# EAGLE board KAI_nano (EAGLE 9.6.2)
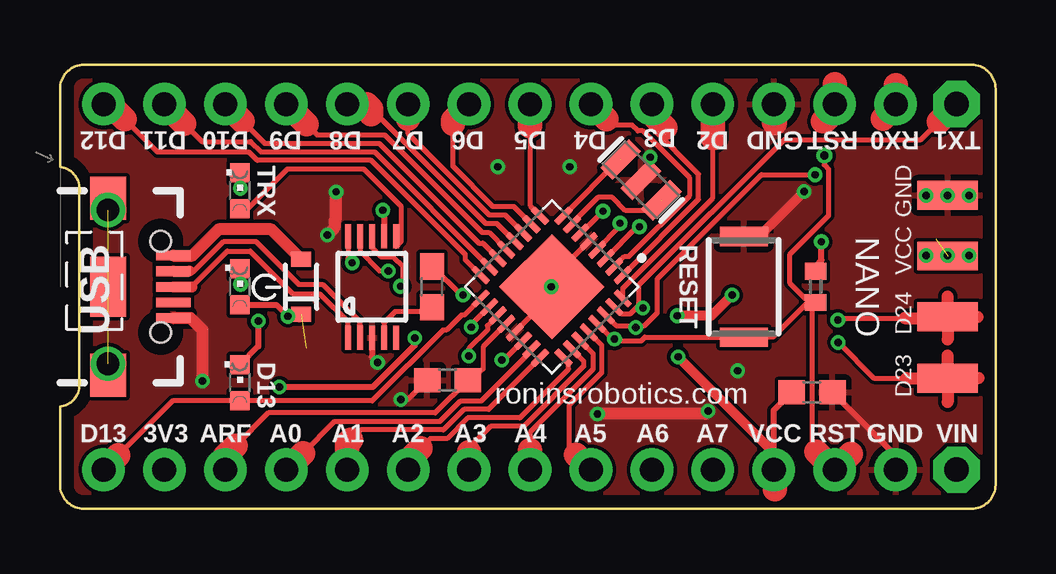
[diagram p0: board, top side]
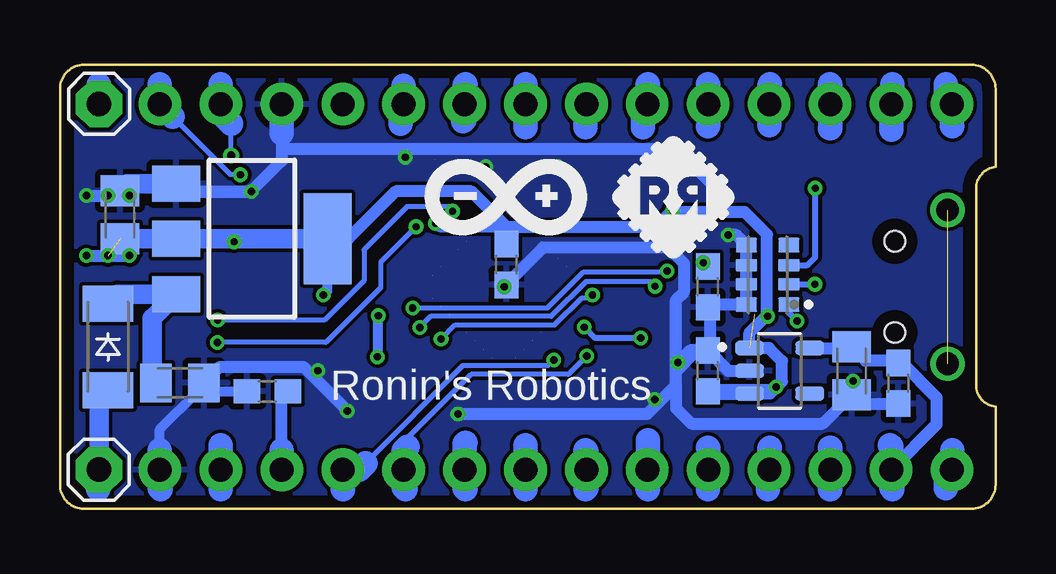
[diagram p1: board, bottom side, seen from below]

Size 39 x 18.5 mm. Coordinates in mm from the lower left corner, seen from the top.
Outline: 1,18.5 arc90 0,17.5 0,14.25 arc-90 0.8,13.25 0.8,5.25 arc-90 0,4.25 0,1 arc90 1,0 38,0 arc90 39,1 39,17.5 arc90 38,18.5 1,18.5
Copper layers (1*16): Top 0.035mm / dielectric 1.6mm / Bottom 0.035mm
Design rules "Elecrow_2-layer_PCB_eagle_rule": minimum track width 6mil, minimum drill 12mil, track to track 6mil, track to pad 6mil, pad to pad 6mil, via to via 8mil, smd to smd 0mil, copper to edge 20mil, drill to drill 10mil, minimum pad ring 6mil, minimum via ring 6mil, stop-mask expansion 0mil, vias tented up to drill 100mil, thermal gap 10mil

## Footprints (pad centres in the part's own frame; a part is rotated, then mirrored left to right if it is on the bottom)
C0805K = smd 1.3 x 1.6: 1 -1,0; 2 1,0
SOD-323 = smd 0.63 x 0.83: 1 -1.15,0; 2 1.15,0
SOT223 = smd 1.5 x 2: 1 -2.3,-3.15; 2 0,-3.15; 3 2.3,-3.15 | smd 3.8 x 2: 4 0,3.15
USB-B-MICRO-SMD = smd 1.45 x 0.4: D+ 2.725,0; D- 2.725,0.65; GND 2.725,-1.3; ID 2.725,-0.65; VBUS 2.725,1.3 | smd 1.5 x 1.8: SHIELD1 0,3.685; SHIELD2 0,-3.685 | smd 1.5 x 2.5: SHIELD3 0,0 | hole 0.85: 2.2,1.9; 2.2,-1.9
1X01 = drill 1.016 pad 1.93 octagon: 1 0,0
SMD_PAD_1.2MM = smd 2.54 x 1.2: 1 0,0
R0402 = smd 0.7 x 0.9: 1 -0.65,0; 2 0.65,0
RESCAXS80P320X160X70-8N = smd 0.61 x 0.9: 1 -1.24,-0.885; 4 1.24,-0.885; 5 1.24,0.885; 8 -1.24,0.885 | smd 0.53 x 0.9: 2 -0.4,-0.885; 3 0.4,-0.885; 6 0.4,0.885; 7 -0.4,0.885
SKRK = smd 0.8 x 2: 1 -2.1,0; 2 2.1,0
MSOP10 = smd 1 x 0.25: 1 -2.113,1; 2 -2.113,0.5; 3 -2.113,0; 4 -2.113,-0.5; 5 -2.113,-1; 6 2.113,-1; 7 2.113,-0.5; 8 2.113,0; 9 2.113,0.5; 10 2.113,1
QFN50P500X500X90-33N = smd 0.86 x 0.26: 1 -2.435,1.75; 2 -2.435,1.25; 3 -2.435,0.75; 4 -2.435,0.25; 5 -2.435,-0.25; 6 -2.435,-0.75; 7 -2.435,-1.25; 8 -2.435,-1.75; 17 2.435,-1.75; 18 2.435,-1.25; 19 2.435,-0.75; 20 2.435,-0.25; 21 2.435,0.25; 22 2.435,0.75; 23 2.435,1.25; 24 2.435,1.75 | smd 0.26 x 0.86: 9 -1.75,-2.435; 10 -1.25,-2.435; 11 -0.75,-2.435; 12 -0.25,-2.435; 13 0.25,-2.435; 14 0.75,-2.435; 15 1.25,-2.435; 16 1.75,-2.435; 25 1.75,2.435; 26 1.25,2.435; 27 0.75,2.435; 28 0.25,2.435; 29 -0.25,2.435; 30 -0.75,2.435; 31 -1.25,2.435; 32 -1.75,2.435 | smd 3.1 x 3.1: 33 0,0
SOT95P280X145-5N = smd 1.21 x 0.59: 1 -1.255,0.95; 2 -1.255,0; 3 -1.255,-0.95; 4 1.255,-0.95; 5 1.255,0.95
RESONATOR-SMD = smd 0.7 x 1.7: 1 -1.2,0; 2 0,0; 3 1.2,0
C0603 = smd 1.1 x 1: 1 -0.85,0; 2 0.85,0
0603_LED_GREEN = smd 0.8 x 0.8: A 0,-0.75; C 0,0.75
SOD-123_MINI-SMA = smd 1.5 x 2.1: A 1.8,0; C -1.8,0
ARDUINO_NANO = drill 1 pad 1.778: 3V3 7.874,2.794; A0 7.874,7.874; A1 7.874,10.414; A2 7.874,12.954; A3 7.874,15.494; A4 7.874,18.034; A5 7.874,20.574; A6 7.874,23.114; A7 7.874,25.654; D2 -7.366,25.654; D3 -7.366,23.114; D4 -7.366,20.574; D5 -7.366,18.034; D6 -7.366,15.494; D7 -7.366,12.954; D8 -7.366,10.414; D9 -7.366,7.874; D10 -7.366,5.334; D11 -7.366,2.794; D12 -7.366,0.254; D13 7.874,0.254; GND -7.366,28.194; GND1 7.874,33.274; REF 7.874,5.334; RST -7.366,30.734; RST1 7.874,30.734; RX0 -7.366,33.274; TX1 -7.366,35.814; VA 7.874,35.814; VCCA 7.874,28.194

## Placement (x,y rotation side)
C1  CAPACITOR_CER6  [C0805K]  34,5.25 0 bottom
C2  CAPACITOR_CER6  [C0805K]  36.5,12.25 90 bottom
C3  CAPACITOR_CER6  [C0805K]  6,5.75 270 bottom
D2  [SOD-323]  10.05,9.25 90 top
IC1  LD117AS18TR  [SOT223]  31,11.25 270 bottom
J1  [USB-B-MICRO-SMD]  2,9.25 0 top
JP1  [1X01]  37.38,1.63 0 bottom
JP2  [1X01]  37.37,16.87 0 bottom
PAD1  SMD_PAD  [SMD_PAD_1.2MM]  37,5.44 180 top
PAD2  SMD_PAD  [SMD_PAD_1.2MM]  37,13.06 180 top
PAD3  SMD_PAD  [SMD_PAD_1.2MM]  37,10.53 180 top
PAD4  SMD_PAD  [SMD_PAD_1.2MM]  37,8 180 top
R1  RESISTOR1  [R0402]  31.5,9.25 90 top
R7  YC164-JR-071K5  [RESCAXS80P320X160X70-8N]  9.5,9.75 90 bottom
S1  SKRKAEE010  [SKRK]  28.5,9.25 270 top
U1  CH340ESMD  [MSOP10]  13,9.25 90 top
U2  ATMEGA328PB-MU  [QFN50P500X500X90-33N]  20.5,9.25 225 top
U3  TLV73333  [SOT95P280X145-5N]  9,5.75 0 bottom
U$2  RESONATORSMD  [RESONATOR-SMD]  24.22,13.71 315 top
U$5  CAPACITOR_CER4  [C0603]  4.05,5.23 90 bottom
U$7  CAPACITOR_CER4  [C0603]  16.15,5.36 0 top
U$8  CAPACITOR_CER4  [C0603]  20.39,10.18 90 bottom
U$9  CAPACITOR_CER4  [C0603]  15.5,9.25 270 top
U$10  CAPACITOR_CER4  [C0603]  12,9.25 270 bottom
U$12  LED0603_R  [0603_LED_GREEN]  7.5,13.25 0 top
U$14  LED0603_R  [0603_LED_GREEN]  7.5,9.25 0 top
U$15  DIODE123  [SOD-123_MINI-SMA]  37,6.75 270 bottom
U$17  CAPACITOR_CER4  [C0603]  31.35,4.85 0 top
U$18  CAPACITOR_CER4  [C0603]  12,5.75 90 bottom
U$19  CAPACITOR_CER4  [C0603]  30.36,4.89 180 bottom
U$21  LED0603_R  [0603_LED_GREEN]  7.5,5.25 0 top
U$23  ARDUINO_NANO  [ARDUINO_NANO]  1.56,9.5 270 top

## Library data of the parts
C1-C3 R1 U$5 U$7-U$10 U$12 U$14 U$15 U$17-U$19 U$21 = pasif_com1
D2 U$2 = SparkFun
IC1 = v-reg
J1 = SparkFun-Connectors; PROD_ID: CONN-11752
JP1 JP2 = adafruit
PAD1-PAD4 = smd_pad
R7 = YC164-JR-071K5; AVAILABILITY: Unavailable; DESCRIPTION: Resistor network: Y; 1.5kΩ; SMD; 1206; No.of resistors: 4; 63mW; ±5%; MF: Yageo; MP: YC164-JR-071K5; PACKAGE: 1206 Yageo; PRICE: None
S1 = SKRKAEE010; AVAILABILITY: Unavailable; DESCRIPTION: Switch Tactile N.O. SPST Round Button Gull Wing 0.05A 12VDC 1.57N SMD T/R; MF: ALPS; MP: SKRKAEE010; PACKAGE: None; PRICE: None
U1 = CH340E
U2 = atmega; MANUFACTURER: MICROCHIP; PACKAGE: QFN-32; PARTREV: C; STANDARD: IPC 7351B
U3 = TLV73318PDBVR; DESCRIPTION: Capacitor-Free, 300-mA, Low-Dropout Regulator with Foldback Current Limit for Portable Devices 5-SOT-23 -40 to 125; DIGI-KEY_PART_NUMBER: 296-40669-1-ND; DIGI-KEY_PURCHASE_URL: https://www.digikey.com/product-detail/en/texas-instruments/TLV73318PDBVR/296-40669-1-ND/5178546?utm_source=snapeda&utm_medium=aggregator&utm_campaign=symbol; MF: Texas Instruments; MP: TLV73318PDBVR; PACKAGE: SOT-23 Texas Instruments
U$23 = arduino_nano

## Nets
33: C3.1 U3.5 U$5.2 U$23.3V3
A0: U2.23 U$23.A0
A1: U2.24 U$23.A1
A2: U2.25 U$23.A2
A3: U2.26 U$23.A3
A4: U2.27 U$23.A4
A5: U2.28 U$23.A5
A6: U2.19 U$23.A6
A7: U2.22 U$23.A7
ARF: U2.20 U$7.2 U$23.REF
D2: U2.32 U$23.D2
D3: U2.1 U$23.D3
D4: U2.2 U$23.D4
D5: U2.9 U$23.D5
D6: U2.10 U$23.D6
D7: U2.11 U$23.D7
D8: U2.12 U$23.D8
D9: U2.13 U$23.D9
D10: U2.14 U$23.D10
D11: U2.15 U$23.D11
D12: U2.16 U$23.D12
D13: U2.17 U$21.A U$23.D13
D23: PAD1.1 U2.3
D24: PAD4.1 U2.6
GND: C1.2 C2.2 C3.2 IC1.1 J1.GND PAD2.1 R7.5 R7.6 R7.7 R7.8 S1.1 U1.3 U2.5 U2.21 U3.2 U$2.2 U$5.1 U$7.1 U$8.1 U$10.2 U$17.2 U$18.2 U$19.2 U$23.GND U$23.GND1
IN: U$15.A U$23.VA
N$1: R7.1 U$21.C
N$3: J1.D- U1.2
N$4: R7.3 U$12.C
N$5: U1.10 U$10.1
N$6: J1.D+ U1.1
N$7: D2.2 J1.VBUS
N$8: U1.4 U$9.2
N$9: R7.2 U$14.C
N$10: U1.6 U$12.A
N$12: C1.1 IC1.3 U$15.C
OC1: U2.7 U$2.3
OC2: U2.8 U$2.1
RST: R1.1 S1.2 U2.29 U$9.1 U$23.RST U$23.RST1
RX: U1.8 U2.30 U$23.RX0
TX: U1.9 U2.31 U$23.TX1
VCC: C2.1 D2.1 IC1.4 PAD3.1 R1.2 U1.7 U2.4 U2.18 U3.1 U3.3 U$8.2 U$14.A U$17.1 U$18.1 U$19.1 U$23.VCCA

## Tracks (layer width: path | path; a pad name or v marks a point on that pad's centre or on a via)
33
  Bottom 0.508: U3.5 6.05,6.7 C3.1 5.41,6.16 4.13,6.16 U$5.2 3.91,6.08 2.47,4.63 2.47,3.51 U$23.3V3
  Bottom 1.016: 4.3,0.82 4.35,0.87 U$23.3V3 4.35,2.6 4.4,2.65
A0  (1 unrouted)
  Top 0.203: 10.13,2.32 11.45,3.64 15.84,3.64 16.7,4.5 17.57,4.5 19.66,6.59 U2.23
  Top 1.016: U$23.A0 10.13,2.32
  Bottom 1.016: 9.5,0.82 9.5,1.56 U$23.A0 9.43,2.52 9.4,2.55
A1  (1 unrouted)
  Top 0.203: U2.24 17.87,4.14 16.85,4.14 15.99,3.28 12.52,3.28 11.97,2.73
  Top 1.016: U$23.A1 11.97,2.73 12.12,2.88 12.14,2.88
  Bottom 1.016: 12,0.82 12,1.6 U$23.A1 11.97,2.52 12,2.55
A2  (1 unrouted)
  Top 0.203: U2.25 21.21,6.07 21.21,5.82 19.17,3.79 17,3.79 16.13,2.93 15.44,2.93 14.51,2
  Top 1.016: U$23.A2 14.51,2 15.03,2.52
  Bottom 1.016: 14.5,0.82 14.51,0.83 U$23.A2 14.5,2.85
A3  (1 unrouted)
  Top 0.203: U2.26 21.83,6.15 21.83,5.93 19.33,3.43 17.95,3.43 17.05,2.53 17.05,2.35
  Top 1.016: U$23.A3 17.05,2.35
  Bottom 1.016: 17.1,0.82 17.05,0.86 U$23.A3 17.05,2.4 17.1,2.45
A4  (1 unrouted)
  Top 0.203: U2.27 22.22,6.47 22.22,5.82 19.59,3.19 19.59,2.45
  Top 1.016: U$23.A4 19.59,2.45
  Bottom 1.016: U$23.A4 19.6,0.82 19.59,0.82 U$23.A4 | U$23.A4 19.59,2.64 19.6,2.65
A5  (1 unrouted)
  Top 0.203: 21.5,2.25 21.24,2.52 21.24,4.33 22.58,5.67 22.58,6.82 U2.28
  Top 1.016: U$23.A5 21.5,2.25
  Bottom 1.016: 22.1,2.75 22.13,2.72 U$23.A5 22.13,0.85 22.1,0.82
A6  (via drill 0.3)  (1 unrouted)
  Top 0.203: v17.04,6.37 17.04,6.67 17.82,7.45 17.82,7.63 U2.19
  Bottom 0.203: v17.04,6.37 17.8,5.61 21.86,5.61 24.67,2.79 U$23.A6
  Bottom 1.016: 24.51,2.58 24.67,2.41 U$23.A6 24.67,0.89 24.6,0.82
A7  (via drill 0.3)  (1 unrouted)
  Top 0.203: U2.22 18.51,6.2 v18.42,6.2
  Bottom 0.203: v18.42,6.2 18.65,5.97 22.19,5.97 26.26,1.91
  Bottom 1.016: 26.26,1.91 26.54,1.63 U$23.A7 27.21,0.83 27.2,0.82
ARF  (1 unrouted)
  Top 0.203: U2.20 17.64,6.75 17.64,5.83 17.17,5.36 U$7.2 15.64,4 8.68,4 7.32,2.63
  Top 1.016: U$23.REF 6.89,2.21 7.32,2.63
  Bottom 1.016: 6.9,0.82 6.89,0.82 U$23.REF 6.89,2.54 6.9,2.55
D2  (1 unrouted)
  Top 0.203: U2.32 23.46,9.19 27.21,12.95 27.21,15.45
  Top 1.016: U$23.D2 27.21,15.45
D3  (1 unrouted)
  Top 0.203: U$23.D3 24.67,15.89 26.62,13.94 26.62,12.9 U2.1
  Top 1.016: U$23.D3 24.67,16.45 25.24,15.89
  Bottom 1.016: 24.8,16.05 24.8,16.74 U$23.D3 24.67,17.62
D4  (1 unrouted)
  Top 0.203: U2.2 23.54,10.52 23.72,10.52 26.26,13.05 26.26,13.79 24.3,15.75 24.09,15.75 23.85,15.99 23.01,15.99 22.78,16.23
  Top 1.016: U$23.D4 22.78,16.23
  Bottom 1.016: 22.2,16.15 22.13,16.22 U$23.D4 22.13,17.65 22.1,17.68
D5  (1 unrouted)
  Top 0.203: 19.59,15.95 19.59,12.63 U2.9
  Top 1.016: U$23.D5 19.59,15.95
  Bottom 1.016: 19.6,17.68 19.59,17.68 U$23.D5 19.59,15.91 19.6,15.91
D6  (1 unrouted)
  Top 0.203: U2.10 18.92,12.6 18.05,12.6 16.38,14.26 16.38,16.05 16.38,16.4 16.85,16.87 U$23.D6
  Top 1.016: U$23.D6 16.38,16.2 16.38,16.05
  Bottom 1.016: U$23.D6 17.1,16.82 17.1,15.91
D7  (1 unrouted)
  Top 0.203: U2.11 18.57,12.24 17.91,12.24 14.51,15.63 14.51,16.25
  Top 1.016: U$23.D7 14.51,16.25
  Bottom 1.016: 14.5,17.68 14.51,17.67 U$23.D7 14.7,16.68 14.7,15.91
D8  (1 unrouted)
  Top 0.203: 12.78,16.87 17.76,11.88 18.22,11.88 U2.12
  Top 1.016: U$23.D8 12.78,16.87 12.97,16.68 12.97,16.45
  Bottom 1.016: 12,17.68 11.97,17.66 U$23.D8 11.97,15.98 12,15.95
D9  (1 unrouted)
  Top 0.203: 10.28,16.02 10.72,15.58 13.54,15.58 17.6,11.52 17.88,11.52 U2.13
  Top 1.016: U$23.D9 10.28,16.02
  Bottom 1.016: 9.4,17.68 9.43,17.65 U$23.D9 9.43,15.98
D10  (1 unrouted)
  Top 0.203: 7.61,16.16 8.53,15.23 13.31,15.23 17.47,11.07 17.64,11.07 18.25,10.45 U2.14
  Top 1.016: U$23.D10 7.61,16.16
  Bottom 1.016: 6.9,17.68 6.89,17.68 U$23.D10 6.89,15.86 6.9,15.85
D11  (1 unrouted)
  Top 0.203: 5.19,16.04 5.92,15.3 7.95,15.3 8.39,14.87 13.12,14.87 U2.15
  Top 1.016: U$23.D11 5.19,16.04
  Bottom 1.016: 4.35,15.8 U$23.D11 4.3,16.92 4.3,17.68
D12  (1 unrouted)
  Top 0.203: U2.16 16.9,10.38 16.9,10.59 12.97,14.52 8.22,14.52 7.88,14.86 4.06,14.86 2.69,16.24
  Top 1.016: U$23.D12 2.06,16.87 2.69,16.24
  Bottom 1.016: 2.07,17.68 2.07,17.28 1.81,17.03 U$23.D12 1.81,15.96 1.8,15.95
D13  (1 unrouted)
  Top 0.203: U2.17 16.85,8.07 16.74,8.07 16.11,7.45 15.96,7.45 13.01,4.5 U$21.A 4.69,4.5 2.42,2.23
  Top 1.016: U$23.D13 2.42,2.23
  Bottom 1.016: 2.07,0.85 2.07,1.22 1.81,1.47 U$23.D13 1.8,2.45
D23  (via drill 0.3)
  Top 0.2: U2.3 24.06,11.75 v24.16,11.75
  Top 0.203: v32.44,6.93 33.93,5.45 35.3,5.45
  Top 0.508: PAD1.1 37,6.39 | PAD1.1 37.01,5.45 38.29,5.45 | PAD1.1 36.99,5.45 35.3,5.45 | PAD1.1 37,4.45
  Bottom 0.203: v24.16,11.75 25.63,10.28 25.63,9.22 27.91,6.93 v32.44,6.93
D24  (via drill 0.3)
  Top 0.2: U2.6 21.74,11.5 v22.63,12.4
  Top 0.203: v32.43,7.87 32.51,7.95 35.2,7.95
  Top 0.508: PAD4.1 36.95,7.95 35.2,7.95 | PAD4.1 37,8.85 | PAD4.1 38.25,8 | PAD4.1 37,7.05
  Bottom 0.203: v22.63,12.4 22.82,12.59 24.53,12.59 26.33,10.79 26.33,9.51 27.97,7.87 v32.43,7.87
GND  (via drill 0.3)  (2 unrouted)
  Top 0.203: U2.5 20.45,9.55 | U2.21 20.21,8.61 20.21,9.31 20.34,9.44 20.45,9.55 | v20.47,9.25 20.45,9.27 20.45,9.55 | U$7.1 14.5,4.55 v14.2,4.55
  Top 0.254: U1.3 13,6.33 v13.24,6.09 | U$2.2 24.61,14.09 v24.61,14.65 | U$17.2 34.83,2.22 U$23.GND1
  Top 0.406: S1.1 29.15,11.35 v31.02,13.23
  Top 0.508: v27.02,4.08 26.89,3.95 v22.41,3.95 | v11.14,11.41 11.47,11.74 11.47,12.03 11.51,12.07 v11.51,13.21 | J1.GND 5.44,7.94 5.94,7.45 v5.94,5.32 | v20.47,9.25 20.34,9.38 20.34,9.44
  Top 1.016: U$23.GND 29.75,16.1 29.79,16.06
  Bottom 0.203: v14.2,4.55 14.2,4.41 14.13,4.34
  Bottom 0.254: v24.61,14.65 24.61,14.88 24.72,14.99
  Bottom 0.406: 33.2,4.95 33.14,4.89 U$19.2 | 33.2,4.95 33.36,5.12 33.11,5.37 C1.2 | 34.83,2.45 34.83,3.31 33.2,4.95 | 34.51,13.4 34.36,13.24 31.04,13.24 v31.02,13.23
  Bottom 0.508: C3.2 5.63,4.38 U$5.1 | U$18.2 11.15,5.75 U3.2 | 11.88,8.51 R7.8 R7.7 R7.6 R7.5 10.81,11.41 v11.14,11.41 | 11.88,8.51 U$10.2 | U$18.2 12.46,6.6 13.32,5.74 | 13.32,5.15 13.32,5.74 | 13.32,5.15 13.32,4.18 12.69,3.55 7.2,3.55 C3.2 | IC1.1 33.81,13.21 31.18,13.21 31.17,13.23 v31.02,13.23 29.75,14.49 29.75,14.99 | 29.75,15.65 29.75,14.99 | C1.2 32.34,5.91 28.85,5.91 v27.02,4.08 | v22.41,3.95 14.51,3.95 14.13,4.34 13.32,5.15 | U$18.2 11.88,6.72 11.88,8.51 | 13.32,5.74 13.32,6.01 | 13.32,6.01 13.32,8.71 12.97,9.05 12.97,10.21 13.64,10.88 18.87,10.88 20.22,9.52 | 20.42,9.33 20.22,9.52 | U$18.2 12.73,6.6 v13.24,6.09 13.32,6.01 | v11.51,13.21 13.29,14.99 24.72,14.99 29.75,14.99 | 20.42,9.33 U$8.1 20.22,9.5 20.22,9.52 | 20.42,9.33 20.48,9.26 | v5.94,5.32 6,5.25 C3.2 | v37.9,13.05 36.7,13.05 C2.2
  Bottom 0.813: IC1.1 36.2,13.55 C2.2
  Bottom 1.016: U$23.GND 29.75,15.65 | 34.8,0.82 34.83,0.85 U$23.GND1 34.83,2.45
  other vias: 36.1,13.05 37,13.05 28.25,5.75 21.25,14.25 18.25,14.25
  pour Top: 0,0.75 arc90 1,-0.25 38,-0.25 arc90 39,0.75 39,17.75 arc90 38,18.75 1,18.75 arc90 0,17.75
  pour Bottom: 1,18.75 38,18.75 arc-90 39,17.75 39,0.75 arc-90 38,-0.25 1,-0.25 arc-90 0,0.75 0,17.75 arc-90
IN
  Bottom 0.813: U$23.VA 37.37,4.58 U$15.A
  Bottom 1.016: U$23.VA 37.4,1.6 37.4,0.82
N$1  (via drill 0.3)
  Top 0.254: v8.27,7.82 8.27,6.77 U$21.C
  Bottom 0.254: R7.1 8.61,8.17 v8.27,7.82
N$2  (via drill 0.95)  (1 unrouted)
  other vias: 2,12.45 2,6.05
N$3
  Top 0.203: 5.39,9.9 5.42,9.87 5.55,9.87 6.82,11.14 8.16,11.14 9.95,9.35 10.94,9.35 11.74,8.56 | 11.74,8.56 11.75,8.56 | U1.2 12.5,7.79 11.74,8.56
  Top 0.254: U1.2 12.5,7.66
  Top 0.45: J1.D- 5.39,9.9
N$4  (via drill 0.3)
  Top 0.254: v7.51,13.36 7.51,13.99 U$12.C
  Bottom 0.254: R7.3 7.84,10.15 7.51,10.48 v7.51,13.36
N$5  (via drill 0.3)
  Top 0.203: U1.10 12,10.43 v12.18,10.25
  Bottom 0.508: U$10.1 12.07,10.25 v12.18,10.25
N$6
  Top 0.203: 5.49,9.25 5.49,9.26 6.97,10.74 7.94,10.74 9.73,8.95 10.84,8.95 12,7.79 U1.1
  Top 0.254: 12,7.37 U1.1
  Top 0.45: J1.D+ 5.49,9.25
N$7
  Top 0.406: J1.VBUS 5.05,10.55
  Top 0.508: D2.2 8.81,11.65 6.61,11.65 5.52,10.55 J1.VBUS
N$8
  Top 0.203: U$9.2 15.35,8.21 13.96,8.21 13.5,7.75 U1.4
N$9  (via drill 0.3)
  Top 0.254: v7.53,9.36 7.5,9.39 U$14.C
  Bottom 0.254: R7.2 v7.54,9.35 v7.53,9.36
N$10
  Top 0.203: U1.6 14,10.93 14.21,11.14 14.21,12.61 12.67,14.16 9.48,14.16 7.82,12.5 U$12.A
  Top 0.254: 7.57,12.57 U$12.A
N$12
  Bottom 0.813: U$15.C 36.6,8.95 IC1.3 35.15,7.95 35.15,5.4 C1.1
OC1  (2 unrouted)
  Top 0.203: U$2.3 24.64,12.43 23.58,12.43 23.03,12.97 22.42,12.97 21.34,11.89 U2.7
OC2  (2 unrouted)
  Top 0.203: U2.8 23.33,14.55 U$2.1
RST  (via drill 0.3, 0.35)  (1 unrouted)
  Top 0.203: U2.29 23.03,7.07 | 23.03,7.07 23.11,7 24.23,7 24.39,7.15 S1.2 29.72,7.15 31.33,8.76 | R1.1 31.33,8.76 | 31.33,8.76 31.34,8.77 31.34,2.58 31.53,2.38 | 23.03,7.07 v23.11,7.07 v23.12,7.07 | v16.8,8.91 16.74,8.91 U$9.1 | v31.86,14.72 31.86,14.33 32.04,14.15 32.04,12.21 30.41,10.58 30.41,9.42 31.07,8.76 31.33,8.76
  Top 1.016: U$23.RST 32.29,17.68 32.3,17.68 U$23.RST | U$23.RST 32.29,16.54 31.89,16.14 31.8,16.14 | 31.53,2.38 U$23.RST1 32.96,2.29
  Bottom 0.203: v23.12,7.07 22.53,7.66 18.38,7.66 17.24,8.79 16.92,8.79 v16.8,8.91 | v31.86,14.72 31.86,16.05 31.86,16.43 U$23.RST
  Bottom 1.016: 31.86,16.05 32.29,16.48 U$23.RST 32.29,17.68 32.3,17.68 | 32.3,2.65 32.29,2.64 U$23.RST1 32.3,0.82
RX  (via drill 0.3)  (1 unrouted)
  Top 0.203: U2.30 23.18,7.63 24.04,7.63 | v31.48,13.92 29.24,13.92 24.9,9.58 24.9,8.16 24.37,7.63 24.04,7.63 | v14.19,9.27 14.3,9.38 14.3,10.1 13.89,10.51 13.37,10.51 13.01,10.87 U1.8 | v24,7.56 24,7.59 24.04,7.63
  Top 1.016: 34.83,17.65 U$23.RX0 34.83,16.78 34.3,16.25
  Bottom 0.203: v31.48,13.92 31.89,13.92 34.31,16.34 | v14.19,9.27 14.4,9.48 17.06,9.48 18.52,8.01 23.54,8.01 v24,7.56
  Bottom 1.016: 34.31,16.34 U$23.RX0 34.83,17.68
TX  (via drill 0.3)  (1 unrouted)
  Top 0.203: U2.31 23.39,8.13 23.79,8.13 24.12,8.46 | 24.12,8.46 24.12,9.3 30.2,15.38 35.89,15.38 36.63,16.12 | U1.9 12.5,10.72 13.31,9.91 v13.68,9.91 | 24.12,8.46 24.21,8.37 v24.3,8.37
  Top 1.016: U$23.TX1 36.63,16.12
  Bottom 0.203: v24.3,8.37 18.67,8.37 17.17,9.87 13.73,9.87 v13.68,9.91
  Bottom 1.016: U$23.TX1 37.37,17.65 37.39,17.66
VCC  (via drill 0.3)  (5 unrouted)
  Top 0.203: U2.4 22.4,10.82 23.34,11.77 v23.34,11.9 | U2.18 17.14,7.67 v17.14,7.57 | v13.46,12.44 13.5,12.4
  Top 0.254: 13.5,12.4 U1.7 | v9.15,5.08 13.05,5.08 14.79,6.81 v14.79,7.12 | U$14.A 9.02,8.5 v9.5,8.02 | R1.2 31.5,10.13 31.74,10.38 v31.74,11.13 | U$23.VCCA 29.75,4.1 U$17.1
  Top 0.406: v28.02,8.9 27.16,8.04 v25.73,8.04 | v25.77,6.33 29.75,2.35 U$23.VCCA
  Top 0.508: D2.1 9.97,8.02 v9.5,8.02
  Top 1.016: U$23.VCCA 29.8,1.58 29.8,0.82
  Bottom 0.254: U$18.1 11.83,5.08 v9.15,5.08 | v14.79,7.12 16.69,7.12 v17.14,7.57 | v31.74,11.13 31.86,11.25 32,11.25
  Bottom 0.406: v28.02,8.9 27.85,9.07 IC1.4 27.85,9.97 | v25.77,6.33 25.73,6.37 v25.73,8.04 | v23.34,11.9 23.19,11.74 20.36,11.74
  Bottom 0.508: 20.36,11.74 14.16,11.74 v13.46,12.44 13.39,12.37 10.46,12.37 9.53,11.44 9.53,8.06 10.25,7.34 U3.1 9.44,6.7 8.9,6.16 8.9,5.3 9.39,4.81 U3.3 11.9,4.8 U$18.1 | 20.36,11.74 21.84,13.22 25.01,13.22 26.98,11.25 IC1.4 | 29.75,2.45 29.75,4.64 U$19.1 | U$8.2 20.39,11.7 20.36,11.74 | v37.9,10.55 v36.1,10.55 36.1,10.85 C2.1
  Bottom 0.813: IC1.4 32,11.25 36.19,11.25 | 36.19,11.25 36.2,11.26 | 36.19,11.25 C2.1
  Bottom 1.016: U$23.VCCA 29.75,2.45
  other vias: 37,10.55

## Text on the board
tPlace: D12 | D11 | D10 | D9 | D8 | D7 | D6 | D5 | D4 | D3 | D2 | GND | RST | RX0 | TX1 | . | TRX | GND | . | RESET | VCC | NANO | D24 | . | D13 | roninsrobotics.com | D23 | D13 | 3V3 | ARF | A0 | A1 | A2 | A3 | A4 | A5 | A6 | A7 | VCC | RST | GND | VIN
bPlace: Ronin's Robotics